# Altium PCB ADA2PCB.PcbDoc
Units mil, origin at the board's own origin, x right, y up, seen from the top; angles counter-clockwise.
Board outline 3543.31 x 2165.35 mil, 4 copper layers (L1-TOP, L2-GND, L3-PWR, L4-BOT), stack 24.712 mil thick; 77 components, 47 nets, 303 pads, 115 vias.
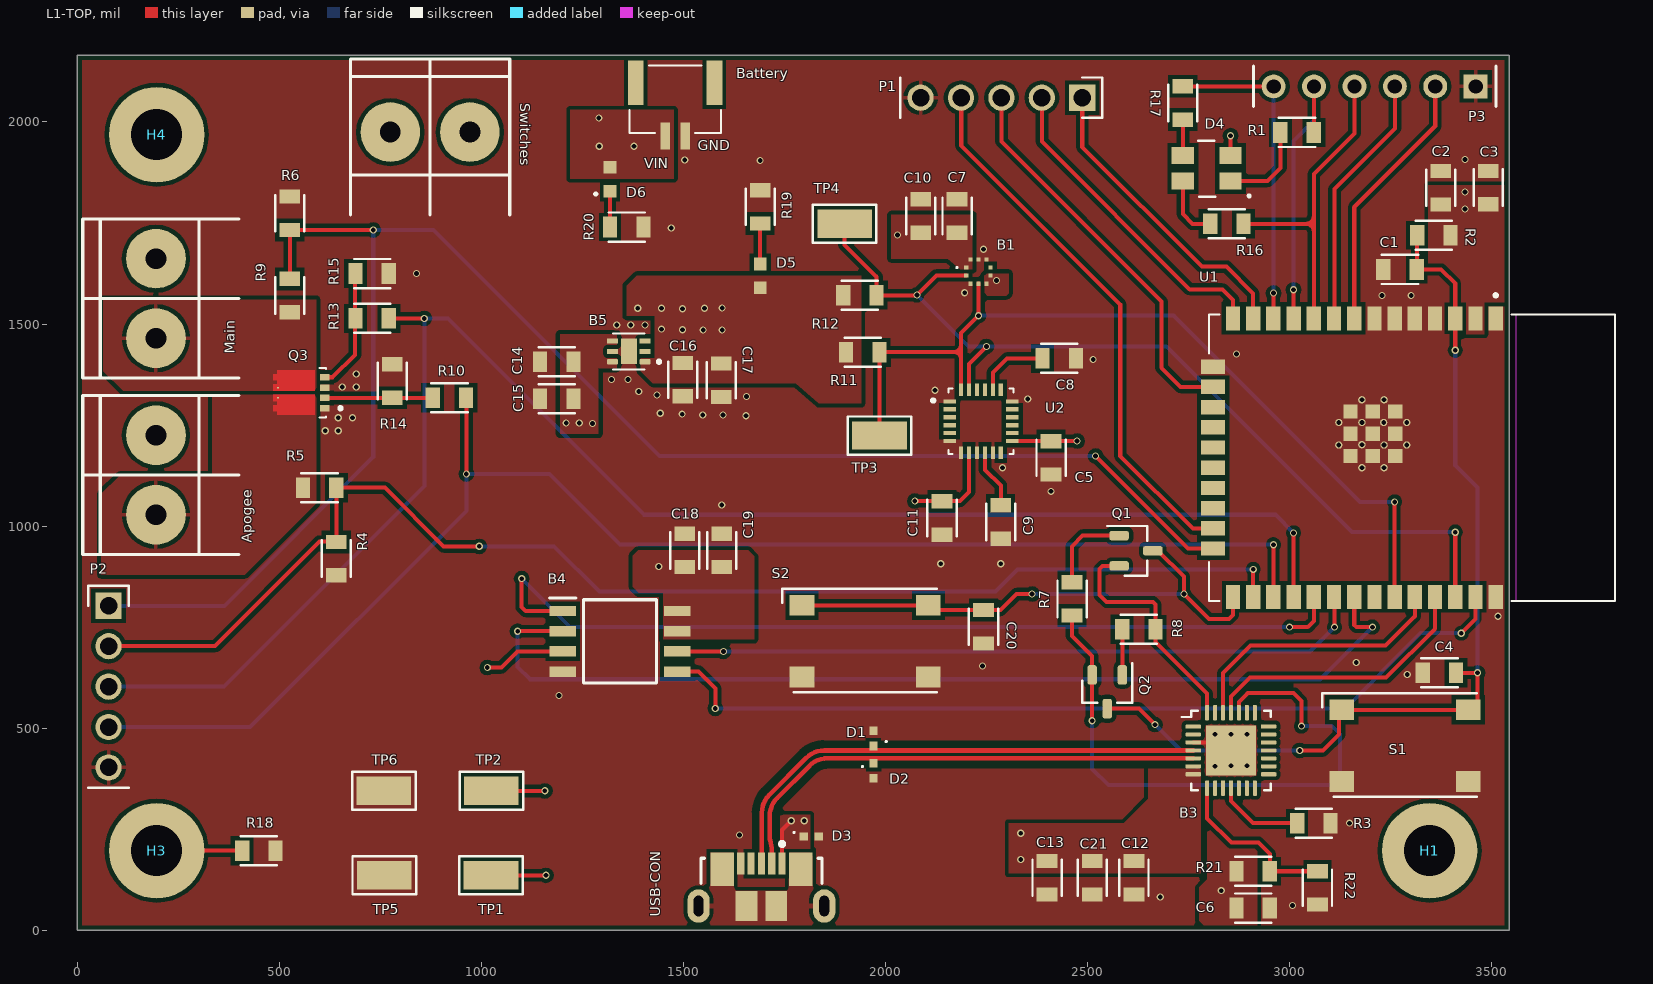
[diagram p0: L1-TOP view]
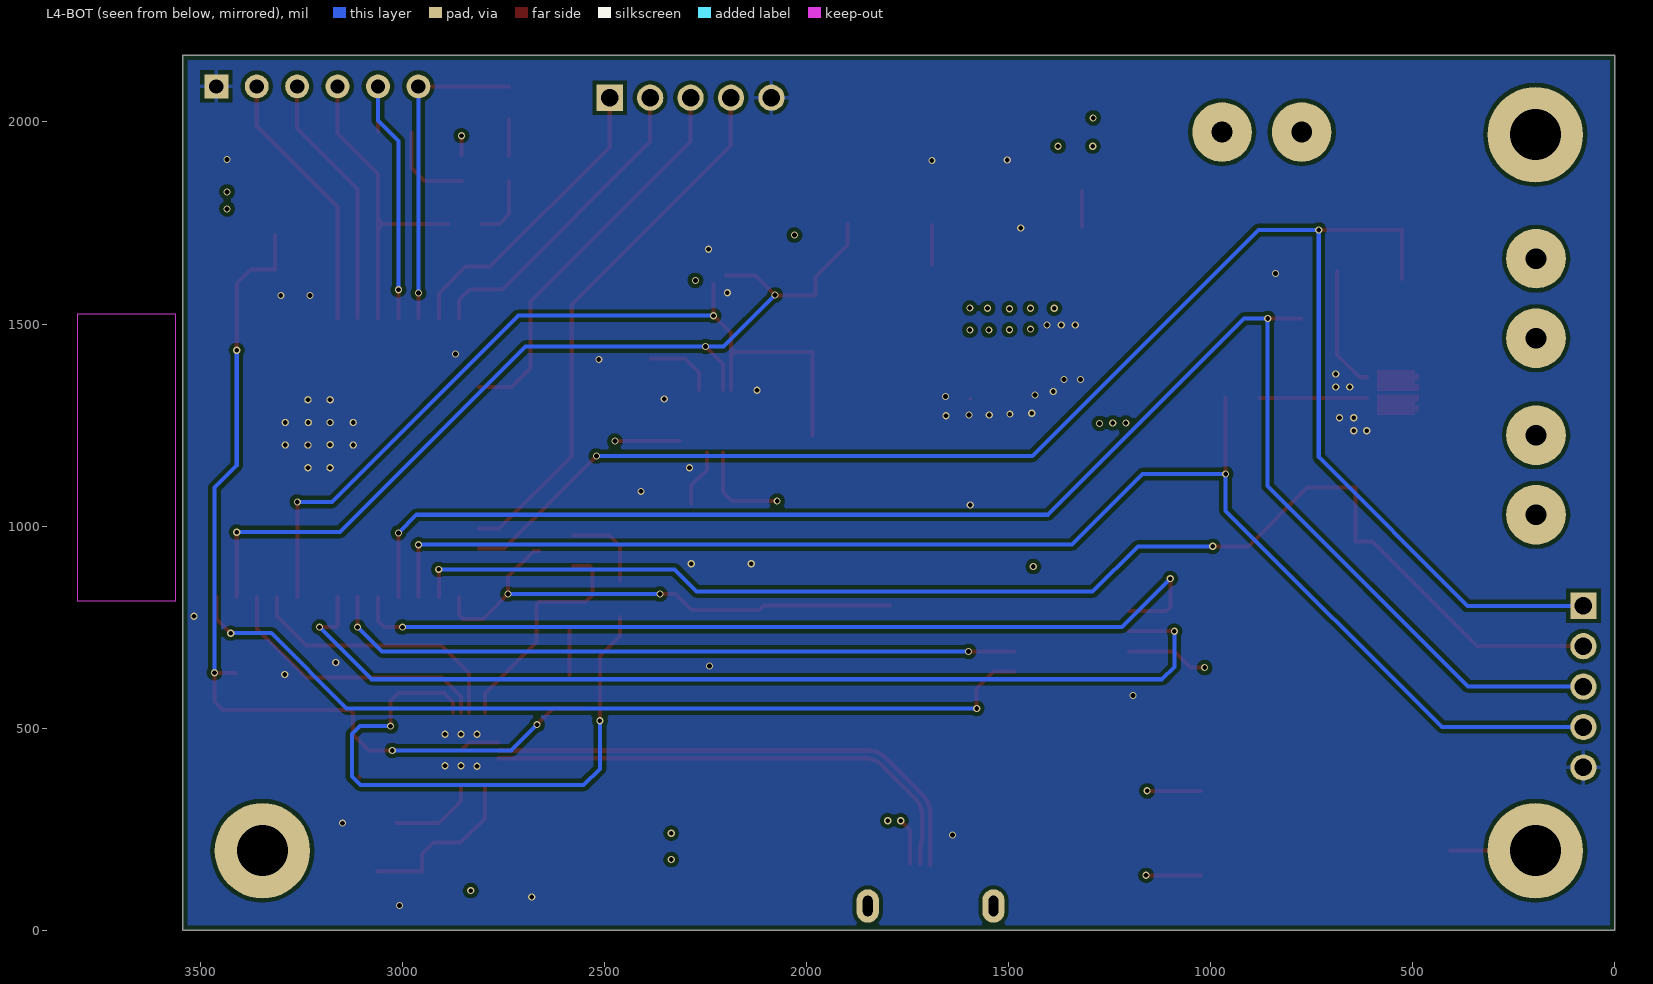
[diagram p1: L4-BOT view, seen from below]
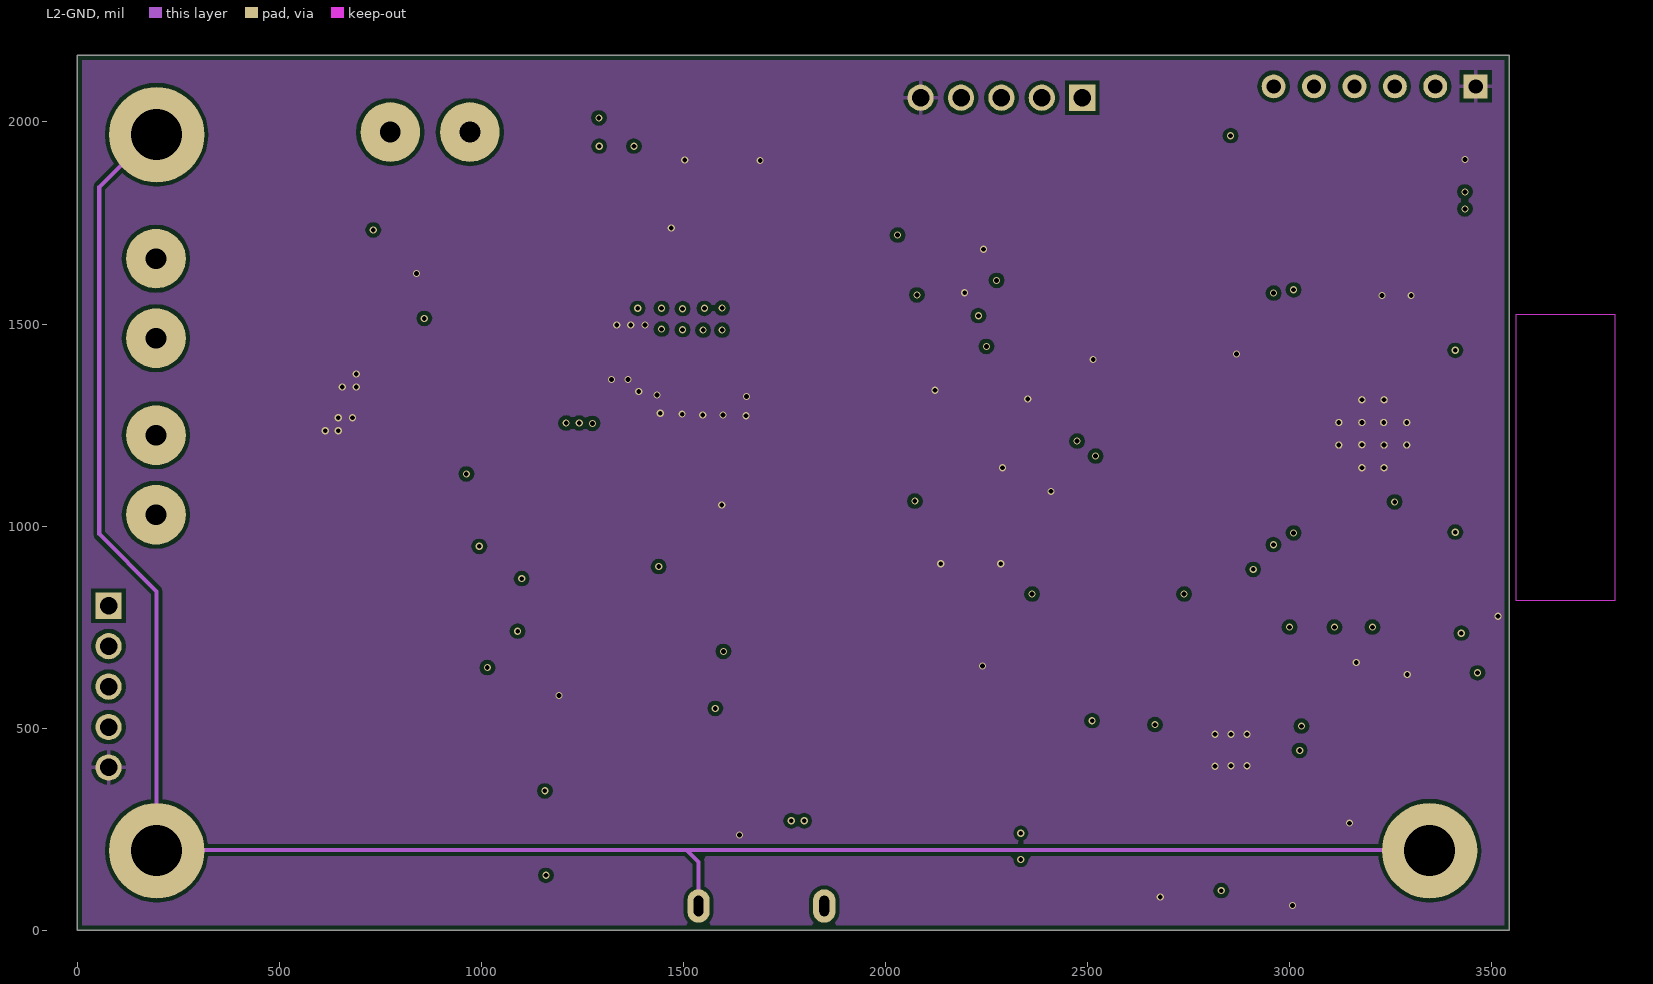
[diagram p2: L2-GND]
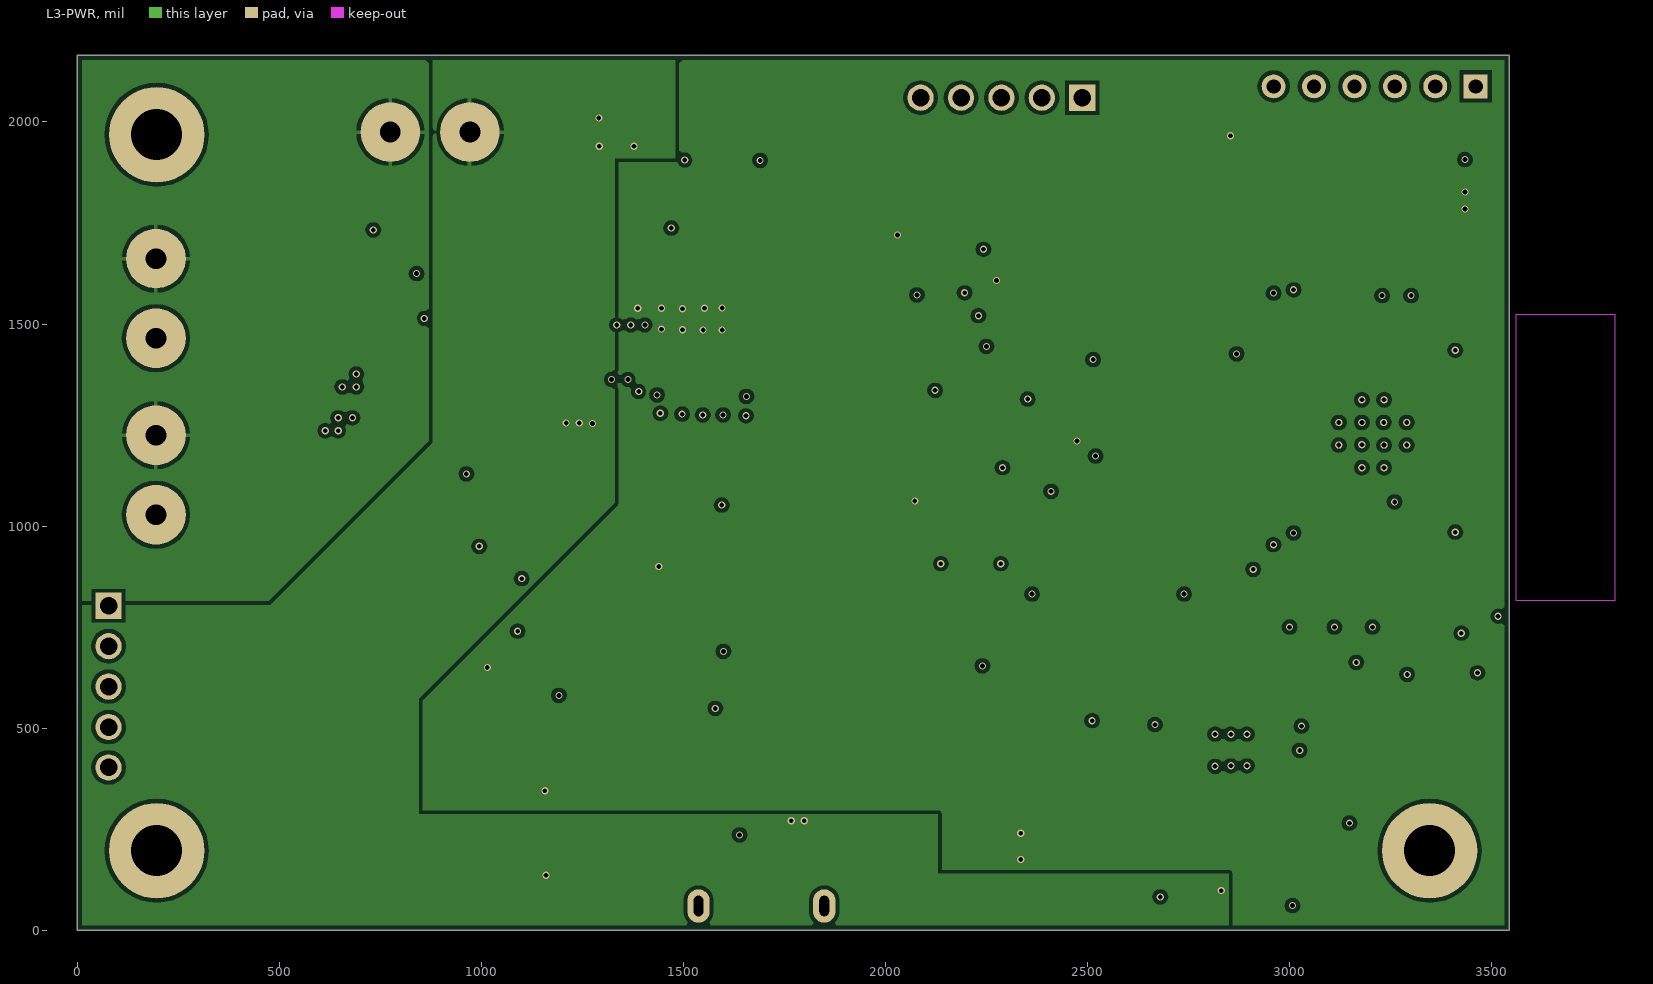
[diagram p3: L3-PWR]
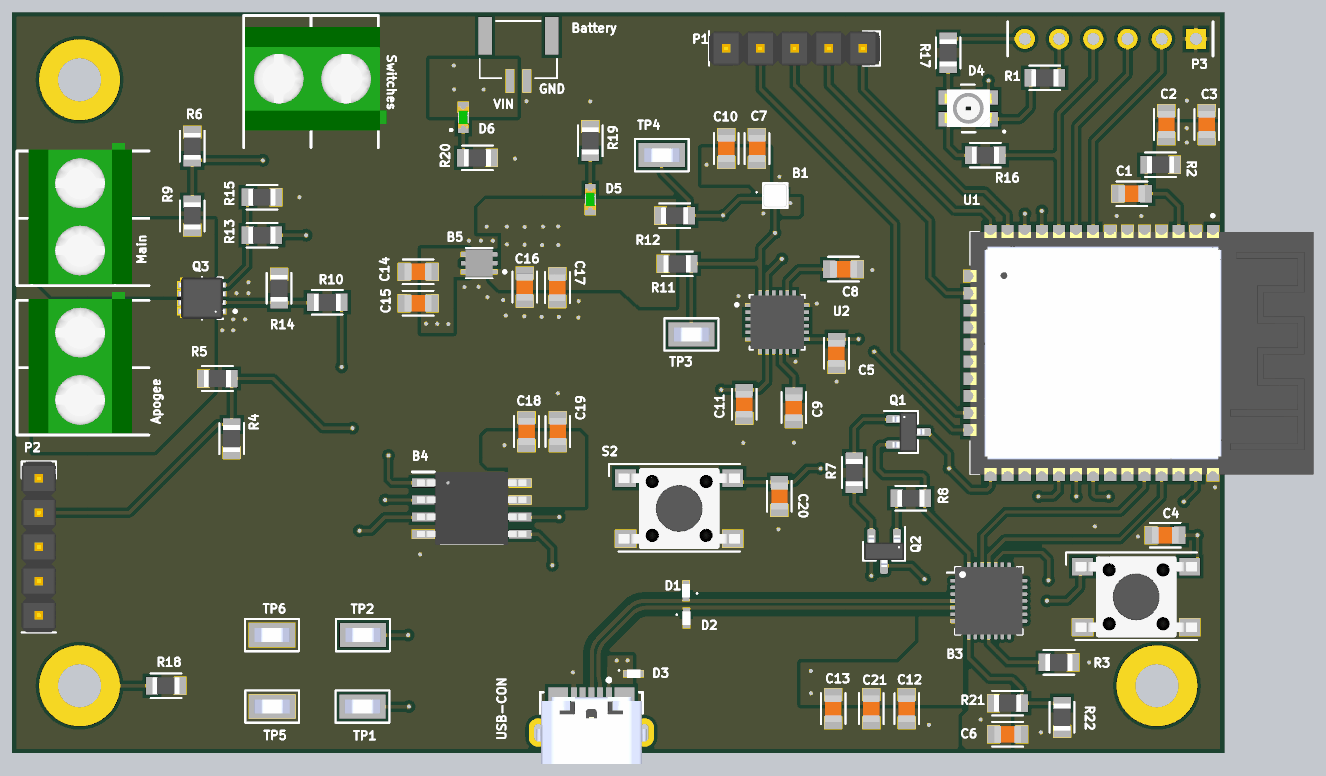
[diagram p4: 3D render of the assembled board from above, using the file's embedded part models]

## Layer stack, top to bottom
Top Solder: solder mask 0.8, Solder Resist, Dk 3.8
L1-TOP: signal copper 1.3778
Dielectric 1: prepreg 8.2835, Prepreg 7628x1, Dk 4.6
L2-GND: signal copper 0.5984
Dielectric2: core 4.1929, Core, Dk 4.5
L3-PWR: signal copper 0.5984
Dielectric3: prepreg 8.2835, Prepreg 7628x1, Dk 4.6
L4-BOT: signal copper 1.3778
Bottom Solder: solder mask 0.8, Solder Resist, Dk 3.8

## Board outline
0,0 3543.31,0 3543.31,2165.35 0,2165.35

## Design rules (kind name [scope] priority, off if disabled: settings)
AssemblyTestPointUsage [All] p1: valid=2
AssemblyTestpoint [All] p1: testpointundercomponent=TRUE minsize=40 maxsize=150 preferedsize=60 minholesize=0 maxholesize=40 preferedholesize=32 testpointgrid=1 usegrid=FALSE gridtolerance=0.01 allowsidetop=TRUE allowsidebottom=TRUE
BoardOutlineClearance [not InComponent('Switches') and not InComponent('Apogee') and not InComponent('Main') and not InComponent('P2') and not InComponent('U1')] p1: gap=11.81 ignorepadtopadclearanceinfootprint=FALSE
Clearance Clearance_diff_pairs [(InDifferentialPairClass('All Differential Pairs'))] p1: gap=10 ignorepadtopadclearanceinfootprint=FALSE except(0: Arc-Hole Track-Hole SMDPad-Hole THPad-Hole Via-Hole Fill-Hole Poly-Hole Region-Hole Text-Hole; 5: SMDPad-SMDPad Region-Region; 7.87: Arc-Arc Arc-Track Arc-SMDPad Arc-THPad Track-Track Track-SMDPad Track-THPad; 19.68: SMDPad-THPad THPad-THPad; 20: Arc-Poly Track-Poly)
Clearance [All] p2: gap=10 ignorepadtopadclearanceinfootprint=FALSE except(0: Arc-Hole Track-Hole SMDPad-Hole THPad-Hole Via-Hole Fill-Hole Poly-Hole Region-Hole Text-Hole; 5: SMDPad-SMDPad Region-Region; 7.87: Arc-Arc Arc-Track Arc-SMDPad Arc-THPad Track-Track Track-SMDPad Track-THPad; 19.68: SMDPad-THPad THPad-THPad)
ComponentClearance [All] p1: gap=19.68 collisioncheckmode=3 verticalgap=19.68 showdistances=FALSE
DiffPairsRouting [InDifferentialPairClass('USB')] p1: maxlimit=10 minlimit=8 mostfreqgap=10 toplayer_maxgap=8 toplayer_prefgap=8 toplayer_minwidth=11.26 toplayer_maxwidth=11.26 toplayer_prefwidth=11.26 bottomlayer_maxgap=8 bottomlayer_prefgap=8 bottomlayer_minwidth=11.26 bottomlayer_maxwidth=11.26 bottomlayer_prefwidth=11.26 substack1={B8E2DC52-5689-4034-8AED-2EC460D39702} impedanceprofiledriven=TRUE impedanceprofileid={5A9343DB-4517-4BA5-8A03-30A343909D30} impedanceprofilevalue=90.000000 maxuncoupledlength=500
FabricationTestPointUsage [All] p1: valid=2 allowmultiple=FALSE
FabricationTestpoint [All] p1: side=3 testpointundercomponent=TRUE minsize=40 maxsize=150 preferedsize=60 minholesize=0 maxholesize=40 preferedholesize=32 testpointgrid=1 allowsidetop=TRUE allowsidebottom=TRUE usegrid=FALSE gridtolerance=0.01
HoleSize [All] p1: absolutevalues=TRUE maxlimit=248.03 minlimit=11.81 maxpercent=80.000 minpercent=20.000
HoleToHoleClearance [All] p1: gap=19.68 allowstackedmicrovias=TRUE
MinimumAnnularRing [All] p1: minimumring=2.93
MinimumSolderMaskSliver [All] p1: minsoldermaskwidth=3.9
PolygonConnect PolygonConnect_ESP32 [HasFootprint('XCVR_ESP32-WROOM-32E_(16MB)')] p1: connectstyle=Direct reliefconductorwidth=10 reliefentries=4 polygonreliefangle="90 Angle" airgapwidth=10
PolygonConnect [All] p2: thpad.connectstyle=Relief thpad.reliefconductorwidth=10 thpad.reliefentries=4 thpad.polygonreliefangle="90 Angle" thpad.airgapwidth=10 smdpad.connectstyle=Direct smdpad.reliefconductorwidth=10 smdpad.reliefentries=4 smdpad.polygonreliefangle="90 Angle" smdpad.airgapwidth=10 via.connectstyle=Direct via.reliefconductorwidth=10 via.reliefentries=4 via.polygonreliefangle="90 Angle" via.airgapwidth=10
RoomDefinition Mounting [InComponentClass('Mounting')] p1: confinementstyle=ConfineIn formatcopy=TRUE lockcomponents=FALSE outline 57,57 3486,57 3486,2108 57,2108
RoomDefinition "ESP32 perifericos" [InComponentClass('ESP32 perifericos')] p2: confinementstyle=ConfineIn formatcopy=TRUE lockcomponents=FALSE outline -10,66 3107,66 3107,2180 -10,2180
RoomDefinition "ESP32 MCU" [InComponentClass('ESP32 MCU')] p3: confinementstyle=ConfineIn formatcopy=TRUE lockcomponents=FALSE outline 5,-59 3836,-59 3836,2162 5,2162
RoutingVias [All] p1: holewidth=11.81 width=17.72 viastyle="Through Hole" minholewidth=11.81 minwidth=17.72 maxholewidth=19.68 maxwidth=39.37
SilkToSolderMaskClearance [All] p1: minsilkscreentomaskgap=5.91 clearancetoexposedcopper=TRUE
SolderMaskExpansion SolderMaskExpansion_vias [IsVia] p1: expansion=4 istentingtop=TRUE
SolderMaskExpansion [All] p2: expansion=1.5 istentingtop=FALSE
Width [All] p1: maxlimit=15.75 minlimit=3.54 preferedwidth=10 substack1={B8E2DC52-5689-4034-8AED-2EC460D39702}
20 further rules are at their usual default settings.

## Classes and differential pairs
differential pair class USB: USB
component class Mounting: H1 H3 H4 R18
component class "ESP32 perifericos": Apogee B1 B4 B5 Battery C5 C7 C8 C9 C10 C11 C14 C15 C16 C17 C18 C19 D4 D5 D6 Main Q3 R1 R4 R5 R6 R9 R10 R11 R12 R13 R14 R15 R16 R17 R19 R20 Switches TP1 TP2 TP3 TP4 TP5 TP6 U2
component class "ESP32 MCU": B3 C1 C2 C3 C4 C6 C12 C13 C20 C21 D1 D2 D3 P1 P2 P3 Q1 Q2 R2 R3 R7 R8 R21 R22 S1 S2 U1 USB-CON
differential pair USB: +USB_P -USB_N

## Components (designator, comment, footprint, x,y, rotation, side; value= is the part's Value field where it differs from the comment)
Apogee "BORNERA 2" BORNERA2 195,1126.57 r0 top
B1 "BMP390" BMP390 2229.96,1629.84 r90 top
B3 "CP2102N-A02-GQFN28R" CP2102N 2855,445 r0 top
B4 "W25Q80DVSSIG" SOIC127P790X216-8N 1343.27,715 r0 top
B5 "LP5912-3.3DRVT" SON65P200X200X80-7N 1365,1432.36 r180 top
Battery "BM02B-GHS-TBT(LF)(SN)" JST_BM02B-GHS-TBT(LF)(SN) 1479.61,2096.89 r180 top
C1 "1u" CAPSMD0805 3273.26,1635 r180 top
C2 "22u" CAPSMD0805 3374,1837.34 r90 top
C3 "100n" CAPSMD0805 3492,1837.5 r90 top
C4 "100n" CAPSMD0805 3370.66,637 r0 top
C5 "100n" CAPSMD0805 2409.74,1168.94 r270 top
C6 "100n" CAPSMD0805 2910,55 r0 top
C7 "100n" CAPSMD0805 2177.2,1767.42 r90 top
C8 "2.2n" CAPSMD0805 2430,1415 r0 top
C9 "100n" CAPSMD0805 2285,1010 r270 top
C10 "1u" CAPSMD0805 2087.5,1767.42 r90 top
C11 "10n" CAPSMD0805 2140,1020 r270 top
C12 "100n" CAPSMD0805 2615,130 r270 top
C13 "1u" CAPSMD0805 2400,130 r270 top
C14 "100n" CAPSMD0805 1186.66,1407 r180 top
C15 "1u" CAPSMD0805 1186.66,1315 r180 top
C16 "10u" CAPSMD0805 1498.43,1362.34 r270 top
C17 "100n" CAPSMD0805 1594,1361.02 r270 top
C18 "100n" CAPSMD0805 1503.4,940 r90 top
C19 "1u" CAPSMD0805 1595,940 r90 top
C20 "100n" CAPSMD0805 2242.65,751 r90 top
C21 "1u" CAPSMD0805 2511.54,130 r270 top
D1 "ESDALC5-1BT2" ESDALC51BT2 1970,474.7 r90 top
D2 "ESDALC5-1BT2" ESDALC51BT2 1971,394.63 r270 top
D3 "ESDALC5-1BT2" ESDALC51BT2 1816.45,232 r0 top
D4 "LED RGB" 4-PLCC 2795,1885 r180 top
D5 "LED" LEDSMD0603 1690,1619 r270 top
D6 "LED" LEDSMD0603 1318.66,1858.19 r90 top
H1 "HOLE" HOLE_M3#1 3400,155 r0 top
H3 "HOLE" HOLE_M3#2 175,165 r0 top
H4 "HOLE" HOLE_M3#3 125,2020 r0 top
Main "BORNERA 2" BORNERA2 195,1563.43 r0 top
P1 "HEADER-5P-SR" PZ254V-11-05P 2287,2060 r180 top
P2 "HEADER-5P-SR" PZ254V-11-05P 77.82,602.82 r270 top
P3 "Header 6" HDR1X6 3460.48,2088 r180 top
Q1 "S8050" SOT-23-3 2620,935 r90 top
Q2 "S8050" SOT-23-3 2545,590 r0 top
Q3 "TSM200N03DPQ33_RGG" TRANS_TSM200N03DPQ33_RGG 555,1330 r180 top
R1 "470" 0805 3018.66,1974 r0 top
R2 "10k" 0805 3357,1720 r0 top
R3 "10k" 0805 3060,265 r0 top
R4 "10k" 0805 641.34,919.51 r90 top
R5 "10k" 0805 600,1095 r180 top
R6 "10k" 0805 526.24,1774.1 r270 top
R7 "10k" 0805 2461.83,820 r270 top
R8 "10k" 0805 2627,745.04 r0 top
R9 "10k" 0805 526.24,1570.39 r270 top
R10 "470" 0805 921,1317.66 r180 top
R11 "4.7k" 0805 1944,1430.29 r180 top
R12 "4.7k" 0805 1936.66,1571 r180 top
R13 "470" 0805 730,1513.98 r180 top
R14 "10K" 0805 780,1359 r270 top
R15 "10K" 0805 730,1625 r180 top
R16 "470" 0805 2844.81,1748 r0 top
R17 "470" 0805 2736,2047 r90 top
R18 "1M" 0805 449.49,196.85 r180 top
R19 "470" 0805 1689.92,1790 r90 top
R20 "470" 0805 1360,1740 r0 top
R21 "22k" 0805 2910,146 r0 top
R22 "47k" 0805 3069,105 r90 top
S1 "PUSHBUTTON_2" PUSHBUTTON_2 3285.87,456.77 r0 top
S2 "PUSHBUTTON_2" PUSHBUTTON_2 1949.87,715.23 r0 top
Switches "BORNERA 2" BORNERA2 873.43,1975 r270 top
TP1 "TESTPOINT_5015" 5015 1024,136 r0 top
TP2 "TESTPOINT_5015" 5015 1025,345 r0 top
TP3 "TESTPOINT_5015" 5015 1985.34,1224 r180 top
TP4 "TESTPOINT_5015" 5015 1899,1748 r0 top
TP5 "TESTPOINT_5015" 5015 760,136 r0 top
TP6 "TESTPOINT_5015" 5015 759,345 r0 top
U1 "ESP32-WROOM-32E_(16MB)" XCVR_ESP32-WROOM-32E_(16MB) 3302.91,1169.49 r270 top
U2 "MPU-6050" QFN24 2236.3,1259.49 r0 top
USB-CON "Micro-B Molex 1051640001" "Micro-B Molex 1051640001" 1693.09,46.22 r90 top

## Footprints (in the part's own frame and the unit in brackets; to place one, negate y for a bottom-side part, rotate by r counter-clockwise, add the part's x,y. Pads: shape width x height; smd on the part's side, far side on the other; paste and mask are expansions set on the pad)
4-PLCC [mil] "3.2 x 2.8 mm"
  rect 55x42 smd mask+2: 1(-59.06,31.5) 2(-59.06,-31.5) 3(59.06,-31.5) 4(59.06,31.5)
  silkscreen extent -108,-69 21,71, body extent -69,-55 69,55, height 77
0805 [mm]
  rect 0.9x1.3 smd: 1(-1.05,0) 2(1.05,0)
  silkscreen extent -1.14,-0.91 1.14,0.91, body extent -1,-0.63 1,0.63, height 0.58
5015 [mil]
  rect 135x70 smd: 1(0,0)
  silkscreen extent -79,-47 79,47, body extent -52,-20 52,20, height 60
BMP390 [mm]
  rect 0.25x0.275 smd: 1(0.25,0.763) 2(-0.25,0.763) 6(-0.25,-0.763) 7(0.25,-0.763)
  rect 0.275x0.25 smd: 3(-0.762,0.5) 4(-0.762,0) 5(-0.762,-0.5) 8(0.762,-0.5) 9(0.762,0) 10(0.762,0.5)
  silkscreen extent 0.2,1.3 0.3,1.4, body extent -1,-1.02 1,0.98, height 0.75
BORNERA2 [mm] "Bornera con Tornillos 5mm separación"
  round 3.75 hole 1.3: 1(0,2.5) 2(0,-2.5)
  silkscreen extent -4.6,-5 5.2,5, body extent -3.76,-4.89 3.94,5.61, height 10
CAPSMD0805 [mm] "Pasivo 0805"
  rect 0.9x1.3 smd: 1(-1.05,0) 2(1.05,0)
  silkscreen extent -1.14,-0.91 1.14,0.91, body extent -0.99,-0.63 1.01,0.62, height 0.8
CP2102N [mm]
  rrect50% 0.97x0.26 smd: 1(-2.37,1.5) 2(-2.37,1) 3(-2.37,0.5) 4(-2.37,0) 5(-2.37,-0.5) 6(-2.37,-1) 7(-2.37,-1.5) 15(2.37,-1.5) 16(2.37,-1) 17(2.37,-0.5) 18(2.37,0) 19(2.37,0.5) 20(2.37,1) 21(2.37,1.5)
  rrect50% 0.26x0.97 smd: 8(-1.5,-2.37) 9(-1,-2.37) 10(-0.5,-2.37) 11(0,-2.37) 12(0.5,-2.37) 13(1,-2.37) 14(1.5,-2.37) 22(1.5,2.37) 23(1,2.37) 24(0.5,2.37) 25(0,2.37) 26(-0.5,2.37) 27(-1,2.37) 28(-1.5,2.37)
  rect 3.15x3.15 smd paste-0.585: 29(0,0)
  silkscreen extent -3.11,-2.5 2.5,2.5, body extent -2.5,-2.5 2.5,2.5, height 1
ESDALC51BT2 [mm]
  rect 0.55x0.5 smd: 1(-0.475,0) 2(0.475,0)
  silkscreen extent -0.25,-0.86 -0.15,-0.76, body extent -0.5,-0.3 0.5,0.3, height 0.45
HDR1X6 [mm] "Connector; Header; 6 Position"
  rect 1.5x1.5 hole 0.9: 1(0,0)
  round 1.5 hole 0.9: 2(2.54,0) 3(5.08,0) 4(7.62,0) 5(10.16,0) 6(12.7,0)
  silkscreen extent -1.27,-1.27 13.97,1.27
HOLE_M3#1 [mm]
  round 6 hole 3.2: 1(-1.36,1.063)
HOLE_M3#2 [mm]
  round 6 hole 3.2: 1(0.555,0.809)
HOLE_M3#3 [mm]
  round 6 hole 3.2: 1(1.825,-1.308)
JST_BM02B-GHS-TBT(LF)(SN) [mm]
  rect 0.6x1.7 smd: 1(0.625,3.35) 2(-0.625,3.35)
  rect 1x2.8 smd: P1(-2.475,0) P2(2.475,0)
  silkscreen extent -2.88,-1.1 2.88,3.15
LEDSMD0603 [mm] "LED SMD 0603"
  rect 0.8x0.8 smd: A(0.75,0) K(-0.75,0)
  body extent -0.8,-0.4 0.8,0.4, height 0.6
"Micro-B Molex 1051640001" [mm]
  rect 1.38x0.45 smd paste+0 mask+0: 1(3.01,-1.3) 2(3.01,-0.65) 3(3.01,0) 4(3.01,0.65) 5(3.01,1.3)
  rrect100% 2.1x1.4 hole 0.6 slot 1.3 at 0 deg paste-1000 mask+0: 6(0.35,3.95) 11(0.35,-3.95)
  rect 2.1x1.475 smd paste+0 mask+0: 7(2.65,2.462) 10(2.65,-2.462)
  rect 1.9x1.375 smd paste+0 mask+0: 8(0.35,0.937) 9(0.35,-0.937)
  silkscreen extent 1.78,-3.8 4.37,3.8, body extent -2,-4.1 3.15,4.1, height 2.15
PUSHBUTTON_2 [mm]
  rect 1.55x1.3 smd: 1(-3.975,2.25) 1(3.975,2.25) 2(-3.975,-2.25) 2(3.975,-2.25)
  silkscreen extent -5.2,-3.2 4.5,3.3, body extent -4.5,-3 4.5,3, height 4.3
PZ254V-11-05P [mm]
  rect 1.65x1.65 hole 1.1: 1(-5.08,0)
  round 1.65 hole 1.1: 2(-2.54,0) 3(0,0) 4(2.54,0) 5(5.08,0)
  silkscreen extent -6.35,-1.27 6.35,1.27, body extent -6.35,-1.27 6.35,1.27, height 9.51
QFN24 [mm]
  rect 0.79x0.26 smd: 1(-1.97,1.25) 2(-1.97,0.75) 3(-1.97,0.25) 4(-1.97,-0.25) 5(-1.97,-0.75) 6(-1.97,-1.25) 13(1.97,-1.25) 14(1.97,-0.75) 15(1.97,-0.25) 16(1.97,0.25) 17(1.97,0.75) 18(1.97,1.25)
  rect 0.26x0.79 smd: 7(-1.25,-1.97) 8(-0.75,-1.97) 9(-0.25,-1.97) 10(0.25,-1.97) 11(0.75,-1.97) 12(1.25,-1.97) 19(1.25,1.97) 20(0.75,1.97) 21(0.25,1.97) 22(-0.25,1.97) 23(-0.75,1.97) 24(-1.25,1.97)
  silkscreen extent -3.1,-2.05 2.05,2.05, body extent -2,-2 2,2, height 0.93
SOIC127P790X216-8N [mm]
  rect 1.65x0.65 smd: 1(-3.6,1.905) 2(-3.6,0.635) 3(-3.6,-0.635) 4(-3.6,-1.905) 5(3.6,-1.905) 6(3.6,-0.635) 7(3.6,0.635) 8(3.6,1.905)
  silkscreen extent -4.42,-2.62 2.3,2.72, body extent -4.05,-2.68 4.05,2.7, height 2.16
SON65P200X200X80-7N [mm]
  rrect25% 0.69x0.32 smd: 1(-1.02,0.65) 2(-1.02,0) 3(-1.02,-0.65) 4(1.02,-0.65) 5(1.02,0) 6(1.02,0.65)
  rect 1x1.6 smd paste-2: 7(0,0)
  silkscreen extent -2,-1.13 1,1.13, body extent -1,-1 1,1, height 0.72
SOT-23-3 [mm]
  rrect50% 0.59x1.23 smd: 1(1.05,1.06) 2(-0.85,1.06) 3(0.1,-1.06)
  silkscreen extent -1.46,-0.7 1.66,1.8, body extent -1.36,-1.17 1.56,1.17, height 1.12
TRANS_TSM200N03DPQ33_RGG [mm]
  rect 0.6x0.4 smd: 1(-1.475,0.975) 2(-1.475,0.325) 3(-1.475,-0.325) 4(-1.475,-0.975)
  rect 0.1x0.1 smd paste-1 mask+0: 5_6(1.475,-0.325) 7_8(1.475,0.325)
  L1-TOP region: 1.775,-0.525 1.525,-0.525 1.525,-0.775 1.775,-0.775 1.775,-1.175 1.525,-1.175 1.525,-1.415 -0.825,-1.415 -0.825,-0.125 1.775,-0.125
  L1-TOP region: 1.525,1.175 1.775,1.175 1.775,0.775 1.525,0.775 1.525,0.525 1.775,0.525 1.775,0.125 -0.825,0.125 -0.825,1.385 1.525,1.385
  silkscreen extent -2.55,-1.55 -1.14,1.55, body extent -1.68,-1.65 1.68,1.65, height 0.8
XCVR_ESP32-WROOM-32E_(16MB) [mm]
  rect 1.5x0.9 smd: 1(-8.75,5.26) 2(-8.75,3.99) 3(-8.75,2.72) 4(-8.75,1.45) 5(-8.75,0.18) 6(-8.75,-1.09) 7(-8.75,-2.36) 8(-8.75,-3.63) 9(-8.75,-4.9) 10(-8.75,-6.17) 11(-8.75,-7.44) 12(-8.75,-8.71) 13(-8.75,-9.98) 14(-8.75,-11.25) 25(8.75,-11.25) 26(8.75,-9.98) 27(8.75,-8.71) 28(8.75,-7.44) 29(8.75,-6.17) 30(8.75,-4.9) 31(8.75,-3.63) 32(8.75,-2.36) 33(8.75,-1.09) 34(8.75,0.18) 35(8.75,1.45) 36(8.75,2.72) 37(8.75,3.99) 38(8.75,5.26)
  rect 0.9x1.5 smd: 15(-5.715,-12.5) 16(-4.445,-12.5) 17(-3.175,-12.5) 18(-1.905,-12.5) 19(-0.635,-12.5) 20(0.635,-12.5) 21(1.905,-12.5) 22(3.175,-12.5) 23(4.445,-12.5) 24(5.715,-12.5)
  round 0.46 hole 0.3 mask+0: 39_1(-3.632,-1.753) 39_1(-3.632,-3.15) 39_1(-2.21,-0.33) 39_1(-2.21,-1.778) 39_1(-2.21,-4.597) 39_1(-2.21,-3.15) 39_1(-0.813,-3.15) 39_1(-0.787,-0.33) 39_1(-0.787,-1.753) 39_1(-0.787,-4.597) 39_1(0.635,-1.753) 39_1(0.635,-3.15)
  rect 0.9x0.9 smd: 39_1(-2.9,-1.06) 39_2(-1.5,-1.06) 39_3(-0.1,-1.06) 39_4(-2.9,-2.46) 39_5(-1.5,-2.46) 39_6(-0.1,-2.46) 39_7(-2.9,-3.86) 39_8(-1.5,-3.86) 39_9(-0.1,-3.86)
  Keep-Out Layer region: 9,6.56 -9,6.56 -9,12.75 9,12.75
  silkscreen extent -10.3,-12.75 9,12.75, body extent -9,-12.75 9,12.75, height 3.25

## Part data
B1: "Board Mount Pressure Sensors", Manufacturer_Name=BOSCH, Mouser Part Number=262-BMP390, Datasheet Link=https://www.bosch-sensortec.com/media/boschsensortec/downloads/datasheets/bst-bmp390-ds002.pdf, Geometry.Height=0.8mm, Manufacturer_Part_Number=BMP390, Mouser Price/Stock=https://www.mouser.co.uk/ProductDetail/Bosch-Sensortec/BMP390?qs=QNEnbhJQKvYQVfvRMgo2YA%3D%3D
B3: "USB Interface IC USB to UART bridge - QFN28", Manufacturer_Name="Silicon Labs", Mouser Part Number=634-CP2102NA02QFN28R, Datasheet Link=https://www.silabs.com/documents/public/data-sheets/cp2102n-datasheet.pdf, Geometry.Height=0.8mm, Manufacturer_Part_Number=CP2102N-A02-GQFN28R, Mouser Price/Stock=https://www.mouser.co.uk/ProductDetail/Silicon-Labs/CP2102N-A02-GQFN28R?qs=u16ybLDytRag4qKvSH3fTw%3D%3D
B4: "8M-bit 3.0V Serial Flash Memory with uniform 4KB sectors and Dual/Quad SPI", Manufacturer_Name=Winbond, Mouser Part Number=454-W25Q80DVSSIG, Datasheet Link=https://www.winbond.com/hq/search-resource-file.jsp?partNo=W25Q80DVSSIG&type=datasheet, Geometry.Height=2.16mm, Manufacturer_Part_Number=W25Q80DVSSIG, Mouser Price/Stock=https://www.mouser.co.uk/ProductDetail/Winbond/W25Q80DVSSIG?qs=qSfuJ%252Bfl%2Fd6z%2FQYNv5lpMA%3D%3D
B5: "500-mA, low-noise, low-IQ, low-dropout voltage regulator with reverse current protection 6-WSON -40 to 125", Package=None, Availability=Unavailable, MP=LP5912-3.3DRVT, Price=None
Battery: "Connector Header Surface Mount 2 position 0.049 (1.25mm)", Package=None, Availability=Warning, Check_prices=https://www.snapeda.com/parts/BM02B-GHS-TBT(LF)(SN)/JST/view-part/4833827/?ref=eda, MF="JST Corporation", MP=BM02B-GHS-TBT(LF)(SN), Price=None, SnapEDA_Link=https://www.snapeda.com/parts/BM02B-GHS-TBT(LF)(SN)/JST/view-part/4833827/?ref=snap
C1 C2 C3 C4 C5 C6 C7 C8 C9 C10 C11 C12 C13 C14 C15 C16 C17 C18 C19 C20 C21: library part CAP, "Capacitor SMD 4.7nF"
D1 D2 D3: "ESD Suppressors / TVS Diodes Single Line Transil Vbr 5V min 26pF 0", Manufacturer_Name=STMicroelectronics, Mouser Part Number=511-ESDALC5-1BT2, Datasheet Link=http://www.st.com/web/en/resource/technical/document/datasheet/CD00260064.pdf, Manufacturer_Part_Number=ESDALC5-1BT2, Mouser Price/Stock=https://www.mouser.co.uk/ProductDetail/STMicroelectronics/ESDALC5-1BT2?qs=z0iXaKah%2FHDPGBBIoqx%252BQw%3D%3D
D4: "Red, Green, Blue _RGB_ 622nm Red, 530nm Green, 470nm Blue LED Indication - Discrete 1.9V Red, 3V Green, 3V Blue 4-PLCC", Package="PLCC-4 Cree", Digi-Key_Part_Number=CLVBA-FKA-CAEDH8BBB7A363CT-ND, Digi-Key_Purchase_URL=https://www.digikey.com/product-detail/en/cree-inc/CLVBA-FKA-CAEDH8BBB7A363/CLVBA-FKA-CAEDH8BBB7A363CT-ND/2650500?utm_source=snapeda&utm_medium=aggregator&utm_campaign=symbol, MF="Cree Inc.", MP=CLVBA-FKA-CAEDH8BBB7A363, SnapEDA_Link=https://www.snapeda.com/parts/CLVBA-FKA-CAEDH8BBB7A363/Cree%20Inc./view-part/134493/?ref=snap
D5 D6: "LED SMD Verde"
P1 P2: Manufacturer=XFCN, Manufacturer Part Number=PZ254V-11-05P, Supplier Part Number=C492404, Supplier=JLCPCB
P3: "Header, 6-Pin", LatestRevisionDate=17-Jul-2002, LatestRevisionNote="Re-released for DXP Platform.", Publisher="Altium Limited"
Q1 Q2: Manufacturer=JSMSEMI, Supplier Part Number=C916390, Manufacturer Part Number=S8050, Supplier=JLCPCB
Q3: Package=None, Availability=Unavailable, MF="Taiwan Semiconductor", MP=TSM200N03DPQ33_RGG, Price=None
R1 R2 R3 R4 R5 R6 R7 R8 R9 R10 R11 R12 R13 R14 R15 R16 R17 R18 R19 R20 R21 R22: library part RES, "Resistencia SMD 470ohms"
S1 S2: "SWITCH TACTILE SPST-NO 0.05A 12V", Manufacturer=C&K, Manufacturer Part Number=PTS645SM43SMTR92LFS, Supplier Part Number=C221880, Supplier=JLCPCB
TP1 TP2 TP3 TP4 TP5 TP6: "Thimble/Copper Rod/Test Ring ROHS", Manufacturer=Ronghe, Manufacturer Part Number=RH-5015, Supplier Part Number=C5199798, Supplier=JLCPCB
U1: "Bluetooth, WiFi 802.11b/g/n, Bluetooth v4.2 +EDR, Class 1, 2 and 3 Transceiver Module 2.4GHz ~ 2.5GHz Integrated, Trace Surface Mount", Package=None, Availability="Not in stock", Check_prices=https://www.snapeda.com/parts/ESP32-WROOM-32E%20(16MB)/Espressif+Systems/view-part/?ref=eda, MF="Espressif Systems", MP="ESP32-WROOM-32E (16MB)", Price=None, SnapEDA_Link=https://www.snapeda.com/parts/ESP32-WROOM-32E%20(16MB)/Espressif+Systems/view-part/?ref=snap
U2: "MPU-6050 series Accelerometer, Gyroscope, 3 Axis Sensor Evaluation Board", Package="QFN-24 InvenSense", Availability="In Stock", Check_prices=https://www.snapeda.com/parts/MPU-6050/TDK+InvenSense/view-part/?ref=eda, MF="TDK InvenSense", MP=MPU-6050, Price=None, Purchase-URL=https://pricing.snapeda.com/search/part/MPU-6050/?ref=eda, SnapEDA_Link=https://www.snapeda.com/parts/MPU-6050/TDK+InvenSense/view-part/?ref=snap
USB-CON: "USB - micro B USB 2.0 Receptacle Connector 5 Position Surface Mount, Right Angle; Through Hole", Package=None, Availability="In Stock", Check_prices=https://www.snapeda.com/parts/105017-0001/Molex/view-part/?ref=eda, MF=Molex, MP=105017-0001, Price=None, Purchase-URL=https://pricing.snapeda.com/search/part/105017-0001/?ref=eda, SnapEDA_Link=https://www.snapeda.com/parts/105017-0001/Molex/view-part/?ref=snap

## Via types
v1: diameter 17.72, hole 11.81, L1-TOP to L4-BOT, tented both sides, 115 vias

## Nets (pads, with @x,y where several pads share a name; then routed paths per layer and width w, separated by ;. In a path a pad name is that pad's centre, name@x,y a point inside that pad or via, vN(x,y) a via of type N, cw(c..) or ccw(c..) an arc to the next point about the centre after c; other vN are vias at no path point)
3V3: B1.1 B1.5 B1.6 B1.10 B3.6 B3.7 B4.3 B4.7 B4.8 B5.1 C2.1 C3.1 C5.1 C7.1 C10.1 C11.1 C12.1 C13.1 C16.1 C17.1 C18.1 C19.1 C21.1 D4.2 D5.A R2.2 R11.2 R12.2 TP2.1 U1.2 U2.8 U2.13 | length 785.9
  L1-TOP w10: v1(1015,650) 1050,650 1090,690 B4.3 ; TP2.1 v1(1157.28,345) ; v1(2072.81,1062) 2140,1062 2184.09,1062 2206.77,1084.69 U2.8 ; U2.13 C5.1 v1(2474.28,1210.28) ; v1(2854,1966) 2854.06,1965.94 D4.2
  other v1: 2335,175 2335,240 1439,900 1549,1485.2 1596,1485.2 1498,1486 1446,1487.32 1498,1538 1387,1539 1446,1539 1552,1539 1596,1539.69 2274.96,1607.99 2030,1720 3433.81,1785 3433.81,1827
CHASSIS: H1.1 H3.1 H4.1 R18.2 USB-CON.6 USB-CON.7 USB-CON.8 USB-CON.9 USB-CON.10 USB-CON.11 | length 5410.3
  L1-TOP w10: H3.1 R18.2
  L2-GND w10: H4.1 184.5,1968.5 54.7,1838.71 54.7,980.07 196.85,837.92 H3.1 198.86,198.86 1508,198.86 ; USB-CON.6 1537.58,169.28 1508,198.86 ; H1.1 3344.45,198.86 1508,198.86
CS: B4.1 U1.29 | length 2251.6
  L1-TOP w10: v1(1100,870) 1100,800 1110,790 B4.1 ; v1(3000,750) 3045,750 3060,765 U1.29
  L4-BOT w10: v1(1100,870) 1220,750 v1(3000,750)
DTR: B3.28 Q1.2 R8.2 | length 584.7
  L1-TOP w10: Q1.2 2537.39,901.54 2530,894.14 2530,829 2547,812 2662,812 2668.34,805.66 R8.2 2668.34,713 2795.94,585.39 B3.28
FET_APO: Apogee.2 Q3.7_8 R5.2
FET_MAIN: Main.2 Q3.5_6 R9.2
FIRE_APO: P2.4 R10.1 U1.27 | length 3584.4
  L1-TOP w10: v1(963,1129) R10.1@963,1317 ; U1.27 v1(2960,954)
  L4-BOT w10: P2.4 427.81,502.82 963,1038 v1(963,1129) 1168.62,1129 1343.62,954 v1(2960,954)
FIRE_MAIN: P2.3 R13.1 U1.28 | length 4014.6
  L1-TOP w10: R13.1@775,1513.98 v1(858.98,1513.98) ; U1.28 v1(3010,983)
  L4-BOT w10: P2.3 362.81,602.82 858.98,1098.98 v1(858.98,1513.98) 917.28,1513.98 1403.12,1028.14 2964.86,1028.14 v1(3010,983)
GND: B1.3 B1.8 B1.9 B3.3 B3.29 B4.4 B5.5 B5.7 Battery.2 C1.2 C2.2 C3.2 C4.1 C5.2 C6.2 C7.2 C8.2 C9.2 C10.2 C11.2 C12.2 C13.2 C14.2 C15.2 C16.2 C17.2 C18.2 C19.2 C20.1 C21.2 D1.2 D2.2 D3.2 P1.5 P2.5 P3.1 Q3.1 Q3.3 R3.2 R4.1 R6.1 R14.1 R15.1 R18.1 R19.2 R20.2 R22.1 S1.2 S2.2 TP5.1 TP6.1 U1.1 U1.4 U1.5 U1.6 U1.7 U1.15 U1.38 U1.39_1 U1.39_2 U1.39_3 U1.39_4 U1.39_5 U1.39_6 U1.39_7 U1.39_8 U1.39_9 U2.1 U2.6 U2.7 U2.9 U2.11 U2.18 USB-CON.5 | length 102.7
  L1-TOP w10: C17.2@1594,1316.02 C17.2@1594.04,1315.98 ; B3.3 2835.31,464.68 B3.29 ; S1.2@3105.87,379.13 S1.2@3106.73,380
  other v1: 3007.24,61 2680,82.35 1639,236 3148,265 2815.63,405.63 2855,406.97 2894.37,406.97 2815.63,485.13 2855,485.13 2894.37,485.13 1192,581 3291,633 2240,654 3165,662.81 3516,777 2137,907 2285.51,907 1595,1052 2410,1086 2289.7,1144.49 614,1236 646,1236 646,1268 681,1268 1655,1273 1548,1275 1598.23,1275 1497,1277 1443,1279.28 2352.11,1314.38 1656,1321 1435,1324.73 1389.43,1333 2123,1336 656,1344.49 690.78,1344.49 1322,1362.6 1363,1363 690.78,1376.26 2514,1412 2869,1426 1335,1497.73 1370,1497.73 1405,1497.73 3229,1570.39 3300.85,1570.39 2196,1577.38 840,1625 2242.64,1685 1470,1737.42 1690,1904.97 1503.4,1905.83 3434,1907
GPIO0: C20.2 Q1.3 S2.1 U1.25 | length 1309.4
  L1-TOP w10: S2.1@1793.37,803.81 2106.36,803.81 2117.83,792.34 C20.2 2284.85,792.34 2324.51,832 v1(2363,832) ; Q1.3 2675.06,938.94 2739,875 v1(2739,832) 2801,770 2850,770 2860,780 U1.25
  L4-BOT w10: v1(2363,832) v1(2739,832)
GPIO25: P3.4 R16.2 U1.10 | length 829.6
  L1-TOP w10: R16.2 3041.25,1748 ; U1.10 3060,1729.25 ; P3.4 3160.48,1971.49 3060,1871.02 3060,1766.75 ; 3041.25,1748 ccw(c3041.25,1766.75) 3060,1766.75 ; 3041.25,1748 cw(c3041.25,1729.25) 3060,1729.25 ; 3060,1729.25 3060,1766.75
GPIO26: P3.5 R1.2 U1.11 | length 706.7
  L1-TOP w10: U1.11 v1(3010,1584.78) v1@3010.22,1585 ; R1.2@3060.48,1976.52 P3.5
  L4-BOT w10: v1(3010,1584.78) 3010,1953 3060.48,2003.48 P3.5
GPIO27: P3.6 R17.2 U1.12 | length 796.2
  L1-TOP w10: R17.2@2736.34,2088 P3.6 ; U1.12@2960.48,1515.45 v1(2960.48,1576.52)
  L4-BOT w10: v1(2960.48,1576.52) P3.6@2960.48,2087.48
GPIO32: P3.2 U1.8 | length 657.1
  L1-TOP w10: U1.8 3160,1789 3360.48,1989.48 P3.2
GPIO33: P3.3 U1.9 | length 634.6
  L1-TOP w10: U1.9@3110.87,1514.84 3110.87,1834.03 3260.48,1983.64 P3.3@3260.48,2087.48
MES_APO: P2.2 R4.2 R5.1 U1.26 | length 3270.1
  L1-TOP w10: P2.2 341.58,702.82 600.23,961.47 641.34,961.47 R5.1 761.79,1095 906.79,950 v1(995,950) ; U1.26 v1(2910,893)
  L4-BOT w10: v1(995,950) 1180,950 1292,838 2272,838 2327,893 v1(2910,893)
MES_MAIN: P2.1 R6.2 R9.1 U1.24 | length 4101.5
  L1-TOP w10: R9.1 R6.2 v1(732.64,1732.76) ; v1(2520,1173.43) 2748.94,944.49 U1.24
  L4-BOT w10: P2.1 365,802.82 732.64,1170.46 v1(732.64,1732.76) 882.24,1732.76 1441.57,1173.43 v1(2520,1173.43)
MISO: B4.2 U1.31 | length 2497.8
  L1-TOP w10: v1(1090,740) B4.2 ; U1.31 3160,755.86 3165.86,750 v1(3205,750)
  L4-BOT w10: v1(1090,740) 1090,651.2 1120.09,621.11 3076.11,621.11 v1(3205,750)
MOSI: B4.5 U1.37 | length 2188.1
  L1-TOP w10: B4.5 1537.35,640 1579,598.35 v1(1579,549) ; v1(3425,735) 3460,770 U1.37
  L4-BOT w10: v1(1579,549) 3138.59,549 3324.59,735 v1(3425,735)
NetB3_8: B3.8 R21.2 R22.2 | length 420.3
  L1-TOP w10: B3.8 2795.94,277.03 2855.97,217 2923,217 2951.33,188.67 R21.2 R22.2@3062.32,146
NetB3_11: B3.11 R3.1 | length 214.3
  L1-TOP w10: B3.11@2855.12,351.57 2855.12,319.88 2910,265 R3.1@3015,265
NetC8_1: C8.1 U2.20 | length 176.8
  L1-TOP w10: U2.20 2265.83,1380.31 2300.51,1415 C8.1@2385,1415
NetC9_1: C9.1 U2.10 | length 142.7
  L1-TOP w10: U2.10 2246.14,1139.37 2285.51,1100 C9.1@2285.51,1055.51
NetD4_1: D4.1 R1.1 | length 224.8
  L1-TOP w10: D4.1 2945,1853.5 2977.32,1885.83 R1.1
NetD4_3: D4.3 R17.1 | length 90.6
  L1-TOP w10: R17.1@2735.94,2007 D4.3 D4.3@2736,1916.55
NetD4_4: D4.4 R16.1 | length 158.9
  L1-TOP w10: D4.4 2735.94,1772.05 2760,1748 R16.1
NetD5_K: D5.K R19.1 | length 97
  L1-TOP w10: D5.K@1689.92,1648 R19.1@1689.92,1745
NetD6_K: D6.K R20.1 | length 88.7
  L1-TOP w10: R20.1 D6.K
NetQ1_1: Q1.1 R7.1 | length 212.3
  L1-TOP w10: R7.1@2461.83,865 2461.83,950 2488.17,976.34 Q1.1
NetQ2_1: Q2.1 R8.1 | length 110
  L1-TOP w10: Q2.1 R8.1@2586.34,741.72
NetQ3_2: Q3.2 R10.2 R14.2 | length 266.1
  L1-TOP w10: Q3.2 R14.2@779.54,1317.2 ; R14.2@780,1317.04 R10.2@879.66,1317.04
NetQ3_4: Q3.4 R13.2 R15.2 | length 303.8
  L1-TOP w10: Q3.4 632.39,1368.39 687.72,1423.72 687.72,1625 R15.2@687.72,1630
RESET: C1.1 C4.2 Q2.3 R2.1 S1.1 U1.3 | length 2344.3
  L1-TOP w10: Q2.3 2627.5,548.27 v1(2667,508.77) ; v1(3025,445) 3083,445 3121.91,483.91 3121.91,537.9 3129.37,545.35 3444.41,545.35 3465,565.94 v1(3465,637) C4.2 ; R2.1 3315.66,1635 3375.13,1635 3410,1600.13 U1.3 v1(3410,1435)
  L4-BOT w10: v1(2667,508.77) 2730.77,445 v1(3025,445) ; v1(3410,1435) 3410,1150 3465,1095 v1(3465,637)
RTS: B3.24 Q2.2 R7.2 | length 1505
  L1-TOP w10: R7.2@2461.83,775 2461.83,728.17 2511.54,678.46 Q2.2 v1(2511.54,518.47) ; B3.24 2874.69,564.68 2896.54,586.54 3010.22,586.54 3029.76,567 3029.76,505.54 v1(3029.23,505)
  L4-BOT w10: v1(2511.54,518.47) 2511.54,399.46 2552,359 3104,359 3125,380 3125,485.13 3105.13,505 v1(3029.23,505)
RXD: B3.25 U1.35 | length 693.3
  L1-TOP w10: B3.25@2855,538.54 2855,578.37 2901.63,625 3239,625 3360,746 U1.35
SCL: B1.2 R12.1 TP4.1 U1.36 U2.23 | length 2311.3
  L1-TOP w10: TP4.1 1899,1696 1978,1617 R12.1 v1@2079,1571 ; v1(2078,1572) 2126,1620 B1.2 ; U2.23 2206.77,1401.26 v1(2250,1444.49) ; U1.36 v1@3410,983.29
  L4-BOT w10: v1(2078,1572) 2205.51,1444.49 v1(2250,1444.49) 2695.51,1444.49 3155,985 v1(3410,985)
SCLK: B4.6 U1.30 | length 1726.1
  L1-TOP w10: B4.6 v1(1599,690) ; U1.30 3110.87,824.13 v1(3110.87,750)
  L4-BOT w10: v1(1599,690) 3050.87,690 v1(3110.87,750)
SDA: B1.4 R11.1 TP3.1 U1.33 U2.24 | length 2181
  L1-TOP w10: TP3.1 R11.1 ; R11.1@1985.34,1431.08 2170,1431.08 ; U2.24 2187.09,1413.99 ; B1.4 v1(2229.96,1520.59) 2187.09,1477.72 2187.09,1448.16 ; U1.33 v1(3260,1060) ; 2170,1431.08 ccw(c2170,1448.16) 2187.09,1448.16 ; 2170,1431.08 cw(c2170,1413.99) 2170.16,1431.08 cw(c2170,1413.99) 2187.09,1413.99 ; 2187.09,1413.99 2187.09,1448.16
  L4-BOT w10: v1(2229.96,1520.59) 2713.41,1520.59 3174,1060 v1(3260,1060)
TCK: P1.3 U1.16 | length 979.5
  L1-TOP w10: P1.3 2287,1952 2683.15,1555.85 2683.15,1391.85 2730.51,1344.49 U1.16
TDI: P1.2 U1.14 | length 789.4
  L1-TOP w10: P1.2 2387,1952 2753,1586 2834,1586 2860,1560 U1.14
TDO: P1.4 U1.23 | length 1352.5
  L1-TOP w10: P1.4@2187.56,2059.44 2187.56,1941.56 2581,1548.13 2581,1174 2760.51,994.49 U1.23
TMS: P1.1 U1.13 | length 756.3
  L1-TOP w10: P1.1 2487,1938.63 2783.76,1641.87 2843.67,1641.87 2910,1575.54 U1.13
TXD: B3.26 U1.34 | length 679
  L1-TOP w10: B3.26 2835.31,636.32 2903.83,704.83 3237.83,704.83 3310,777 U1.34
USB_N: B3.5 D2.1 USB-CON.2 | length 1235.2
  L1-TOP w11.26: USB-CON.2 1718.68,196.85 ccw(c1656.76,196.85) 1717.32,209.75 1714.57,222.66 ccw(c1653.98,209.9) 1714.53,222.84 cw(c1725.55,225.15) 1714.3,224.73 1713.82,237.98 cw(c1775.7,240.25) 1713.78,240.24 1713.78,283.13 cw(c1775.7,283.13) 1731.86,326.86 1812.45,407.45 cw(c1856.18,363.6) 1856.18,425.53 B3.5@2761.48,425.53
USB_P: B3.4 D1.1 USB-CON.3 | length 1269.8
  L1-TOP w11.26: USB-CON.3@1694.52,161.59 1694.52,291.1 cw(c1756.44,291.1) 1712.6,334.84 1804.47,426.7 cw(c1848.2,382.86) 1848.2,444.79 B3.4@2761.48,444.79
VBAT: Apogee.1 Main.1 Switches.2
VIN: B5.4 B5.6 Battery.1 C6.1 C14.1 C15.1 D3.1 D6.A R21.1 Switches.1 TP1.1 USB-CON.1 | length 251.7
  L1-TOP w10: TP1.1 v1(1160,136) ; USB-CON.1 1744.27,248.27 v1(1767,271)
  other v1: 2831,98 1799,271 1275,1254.21 1210,1255 1242.5,1255 1291.77,1940 1377.79,1940 1290.89,2010
pads on no net: B1.7 B3.1 B3.2 B3.9 B3.10 B3.12 B3.13 B3.14 B3.15 B3.16 B3.17 B3.18 B3.19 B3.20 B3.21 B3.22 B3.23 B3.27 B5.2 B5.3 Battery.P1 Battery.P2 U1.17 U1.18 U1.19 U1.20 U1.21 U1.22 U1.32 U2.2 U2.3 U2.4 U2.5 U2.12 U2.14 U2.15 U2.16 U2.17 U2.19 U2.21 U2.22 USB-CON.4

## Polygon pours and split planes (outlines as drawn)
GND on L2-GND "L2-GND-GND" (solid, remove dead copper, pour order 36): 0,0 3543.31,0 3543.31,2165.35 0,2165.35
3V3 on L3-PWR "L3-PWR-3V3" (solid, remove dead copper, pour order 162): 3540,2160 3530,2170 0,2163.79 0,0 3545,0 3540,5
VBAT on L3-PWR "L3-PWR-VBAT" (solid, remove dead copper, pour order 134): 870,1210 475,815 0,815 0,2160 5,2155 870,2155
VIN on L3-PWR "L3-PWR-VIN" (solid, remove dead copper, pour order 126): 0,0 2130,0 2845,0 2850,5 2849.37,5.63 2849.37,139.66 2130,139.66 2130,287 845,287 845,572.24 1330,1057.24 1330,1220 1330,1413.54 1330,1450.77 1330,1910 1480,1910 1480,2153.31 880,2153.31 880,1206.68 478.13,804.8 12.04,804.8 12.04,12.04
GND on L1-TOP "L1-TOP-GND" (solid, remove dead copper, pour order 184): -222.46,-19.06 3610.27,-19.06 3610.27,2165.35 -227.51,2165.35
VIN on L1-TOP "L1-TOP-VIN" (solid, remove dead copper, pour order 138): 2775.95,24.05 2790,10 2920,10 2920,270 2796,270 2796,126 2775.95,105.95
3V3 on L1-TOP "L1-TOP-3V3 5" (solid, remove dead copper, pour order 96): 3425.29,1474.45 3485.74,1474.45 3485.74,1549 3543.31,1549 3543.31,1626 3543.31,1843 3343.07,1843 3343.07,1601.93 3401.69,1543.31 3425.29,1543.31
CHASSIS on L1-TOP "L1-TOP-CHASSIS" (solid, remove dead copper, pour order 186): 1508,204 1510,202 1626,202 1626,105 1629,102 1631,104 1758,104 1758,200 1759,201 1763.15,196.85 1894,196.85 1894,0 1502,0 1502,200 1500,202 1513,202
VIN on L1-TOP "L1-TOP-VIN 1" (solid, remove dead copper, pour order 140): 1727,138 1814.13,138 1814.13,285.21 1727,285.21
3V3 on L1-TOP "L1-TOP-3V3 3" (solid, remove dead copper, pour order 172): 1835,1303.86 1940,1303.86 1940,1620 1815,1620 1385,1620 1360,1595 1360,1520 1429.14,1520 1429.14,1415.84 1389.43,1415.84 1389.43,1388.68 1424.11,1354 1778.46,1354
FET_MAIN on L1-TOP "L1-TOP-FET_MAIN" (solid, remove dead copper, pour order 116): 587.48,1334.92 113.55,1334.92 65,1383.47 65,1560 68.91,1560 591.26,1560 591.26,1338.7
FET_APO on L1-TOP "L1-TOP-FET_APO" (solid, remove dead copper, pour order 124): 485.12,1325.08 591.38,1325 591.38,1056.38 415,880 60,880 60,1080 105,1125 334,1125 334,1325.08
3V3 on L1-TOP "L1-TOP-3V3" (solid, remove dead copper, pour order 142): 2215,1635 2185,1635 2154.37,1661.85 2015,1661.85 2015,1770 2215,1770
3V3 on L1-TOP "L1-TOP-3V3 1" (solid, remove dead copper, pour order 148): 2244.96,1577.68 2252.24,1570.39 2304.96,1570.39 2304.96,1625 2244.96,1625
VIN on L1-TOP "L1-TOP-VIN 2" (solid, remove dead copper, pour order 150): 1476.81,2029.7 1476.81,1860 1220,1860 1220,2029.7
VIN on L1-TOP "L1-TOP-VIN 3" (solid, remove dead copper, pour order 154): 1195,1475 1339.95,1475 1341.37,1473.58 1341.37,1391.14 1291.77,1391.14 1290,1392.92 1290,1228.54 1195,1228.54 1195,1273.26
3V3 on L1-TOP "L1-TOP-3V3 2" (solid, remove dead copper, pour order 174): 2305,265 2305,140.94 2780,140.94 2780,415 2650,415 2650,325 2590,265
3V3 on L1-TOP "L1-TOP-3V3 4" (solid, remove dead copper, pour order 166): 1448.07,940 1660,940 1675,925 1675,720 1450,720 1450,835 1390,835 1375,850 1375,926.54 1388.46,940
GND on L4-BOT "L4-BOT-GND" (solid, remove dead copper, pour order 176): 0,0 3543.31,0 3543.31,2165.35 0,2165.35

## Silkscreen, mask and mechanical layers (free items; w line width, h text height)
Top Overlay:
  text "GND" at 1536,1930 h25
  text "VIN" at 1403,1885 h25

## Text inside footprints (layer, text, board x,y; h text height)
U1: Mechanical 13 "ANTENNA" at 3657.24,1405.71 h70 r270